# EAGLE board Ticking Sound Generator_EP (EAGLE 9.6.2)
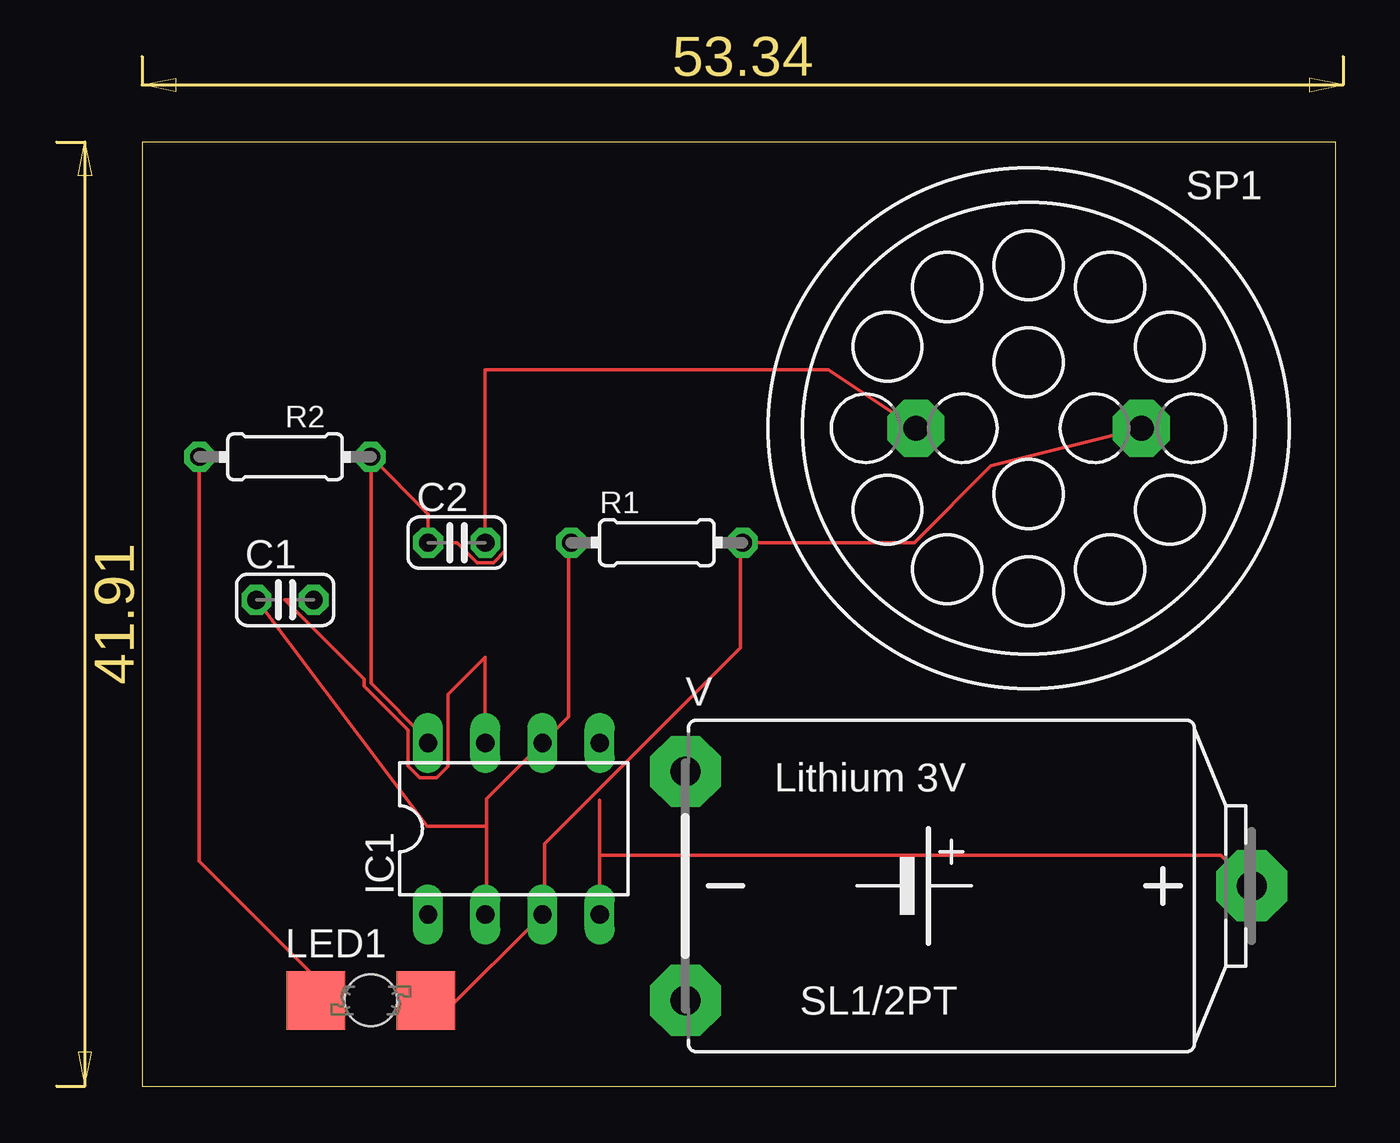
[diagram p0: board, top side]
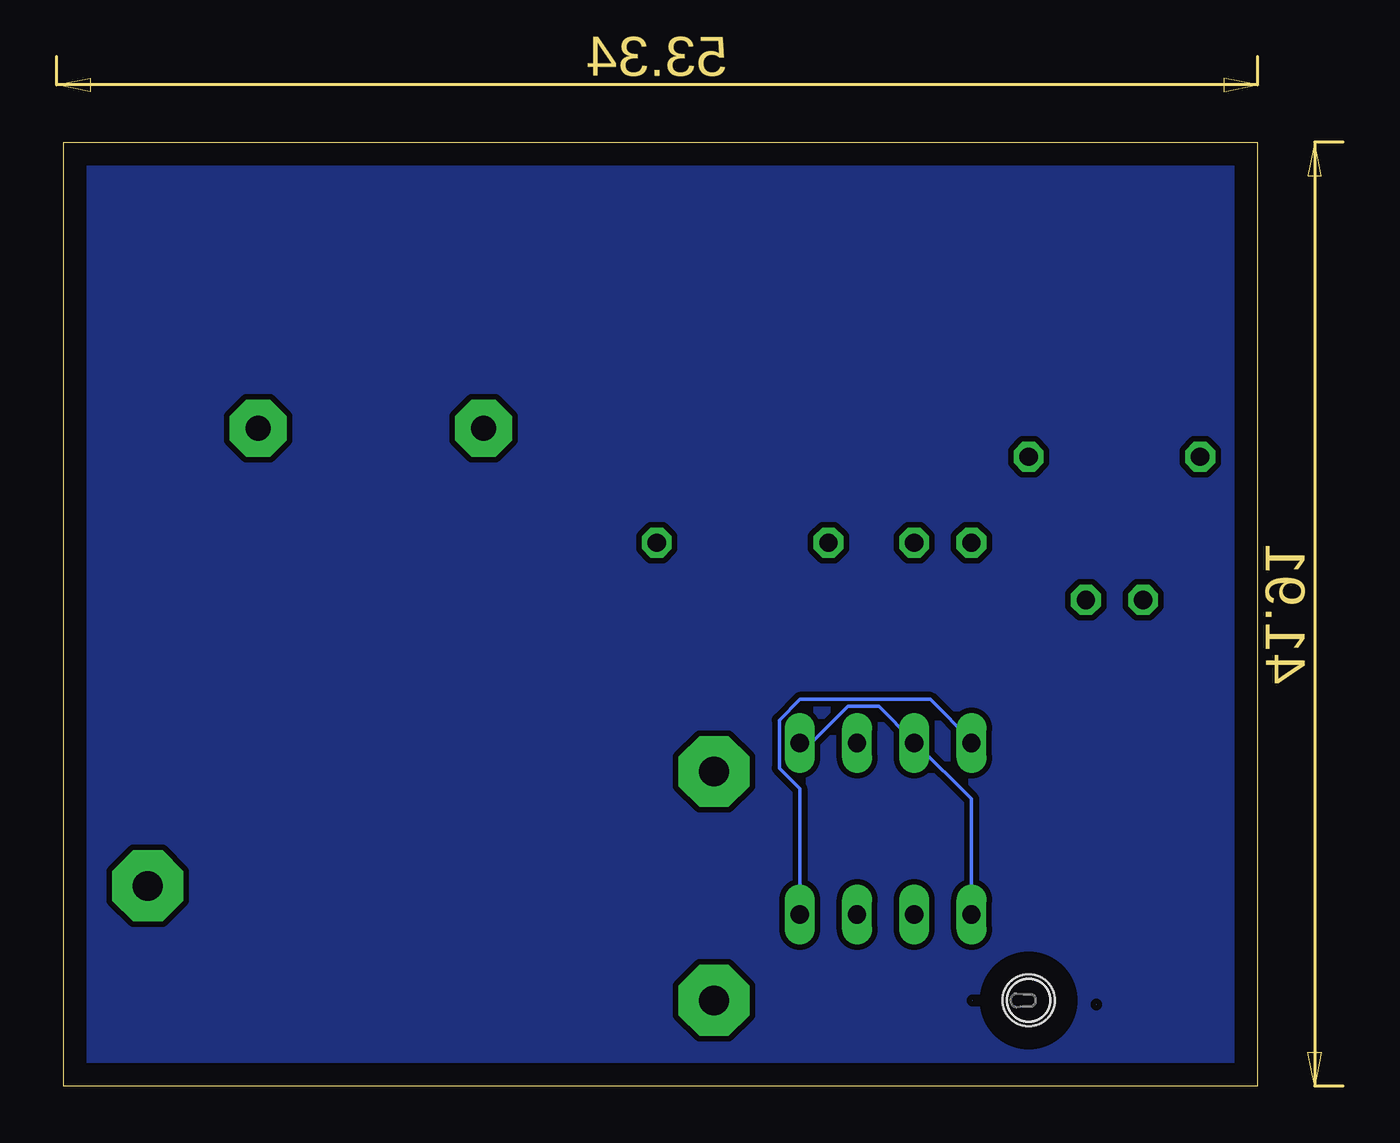
[diagram p1: board, bottom side, seen from below]

Size 53.01 x 41.9 mm. Coordinates in mm from the lower left corner, seen from the top.
Outline: 0,0 53.01,0 53.01,41.9 0,41.9 0,0
Copper layers (1*16): Top 0.035mm / dielectric 1.5mm / Bottom 0.035mm
Design rules "default": minimum track width 6mil, minimum drill 0.35mm, track to track 6mil, track to pad 6mil, pad to pad 6mil, via to via 6mil, smd to smd 6mil, copper to edge 40mil, drill to drill 6mil, minimum pad ring 10mil, minimum via ring 8mil, stop-mask expansion 4mil, vias tented up to drill 0mil, thermal gap 10mil

## Footprints (pad centres in the part's own frame; a part is rotated, then mirrored left to right if it is on the bottom)
C025-024X044 = drill 0.813 octagon: 1 -1.27,0; 2 1.27,0
DIL-08 = drill 0.813 long: 1 -3.81,-3.81; 2 -1.27,-3.81; 3 1.27,-3.81; 4 3.81,-3.81; 5 3.81,3.81; 6 1.27,3.81; 7 -1.27,3.81; 8 -3.81,3.81
P47F-BOTTOM = smd 2.6 x 2.6: A -2.45,0; C 2.45,0 | hole 2.3: 0,0
0204/7 = drill 0.813 octagon: 1 -3.81,0; 2 3.81,0
AL23P = drill 1.118 pad 2.54 octagon: 1 -5.004,0; 2 5.004,0
SL-150-1/2AA/PT = drill 1.321 pad 3.15 octagon: + 12.446,0; - -12.7,-5.08; -@1 -12.7,5.08

## Placement (x,y rotation side)
C1  10uF  [C025-024X044]  6.35,21.59 0 top
C2  10uF  [C025-024X044]  13.97,24.13 0 top
IC1  NE555  [DIL-08]  16.51,11.43 0 top
LED1  [P47F-BOTTOM]  10.16,3.81 0 top
R1  47K  [0204/7]  22.86,24.13 0 top
R2  220R  [0204/7]  6.35,27.94 0 top
SP1  [AL23P]  39.37,29.21 0 top
V  5V-9V  [SL-150-1/2AA/PT]  36.83,8.89 0 top

## Library data of the parts
C1 = rcl; SPICEPREFIX: C1
C2 = rcl; SPICEPREFIX: C
IC1 = st-microelectronics; MF: Arrow Electronics; MPN: NE555N; OC_FARNELL: 1467742; OC_NEWARK: 89K1486
LED1 = led
R1 R2 = rcl; SPICEPREFIX: R
SP1 = buzzer; OC_FARNELL: unknown; OC_NEWARK: unknown
V = battery

## Nets
GND: C1.2 IC1.1 IC1.5 IC1.7
N$1: C2.1 IC1.4 IC1.8 R2.2 V.+
N$2: LED1.A R2.1
N$3: IC1.3 LED1.C R1.2 SP1.2
N$5: C2.2 SP1.1
N$7: C1.1 IC1.2 IC1.6 R1.1

## Tracks (layer width: path | path; a pad name or v marks a point on that pad's centre or on a via)
GND
  Top 0.152: C1.2 6.34,21.59 9.85,18.07 9.85,17.75 11.81,15.8 11.81,14.21 12.33,13.69 13.07,13.69 13.59,14.21 13.59,17.4 15.24,19.05 IC1.7
  Bottom 0.152: IC1.1 12.7,12.45 12.7,12.75 15.14,15.19 IC1.7 15.29,15.34 16.81,16.87 18.19,16.87 19.71,15.34 20.32,15.34 IC1.5
N$1
  Top 0.152: IC1.8 12.7,15.34 10.16,17.88 R2.2 12.7,25.4 C2.1 13.98,24.13 14.87,23.24 15.61,23.24 16.13,23.76 16.13,24.13 | V.+ 47.9,10.26 20.32,10.26 IC1.4 20.32,12.7
  Bottom 0.152: IC1.4 20.32,13.21 21.23,14.12 21.23,16.26 20.32,17.17 17.88,17.17 14.53,17.17 12.7,15.34 IC1.8
N$2
  Top 0.152: R2.1 2.54,9.98 7.71,4.82 LED1.A
N$3
  Top 0.152: LED1.C 13.38,3.22 IC1.3 17.88,7.72 17.88,10.77 26.57,19.46 26.57,24.13 R1.2 34.29,24.13 37.7,27.54 SP1.2
N$4
  pour Bottom (isolate 0.254): 53.34,41.91 53.34,0 0,0 0,41.91
N$5
  Top 0.152: SP1.1 30.48,31.8 15.24,31.8 C2.2
N$7
  Top 0.152: 15.29,11.53 15.29,12.75 IC1.6 18.95,16.41 18.95,24.13 R1.1 | 15.29,11.53 15.29,7.72 IC1.2 | 15.29,11.53 12.65,11.53 C1.1